# EAGLE board main_board (EAGLE 9.6.2)
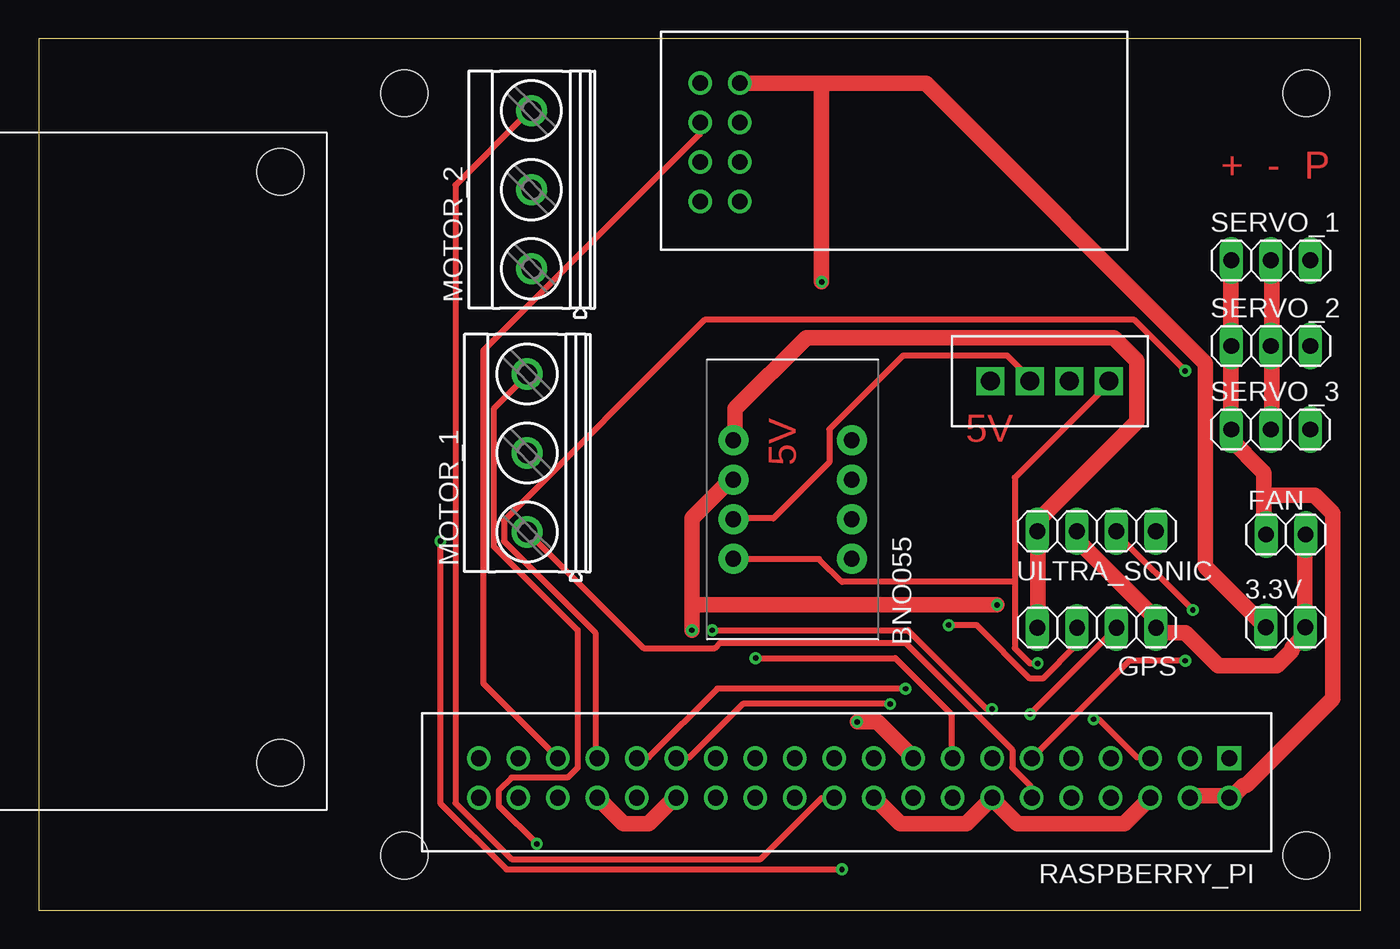
[diagram p0: board, top side]
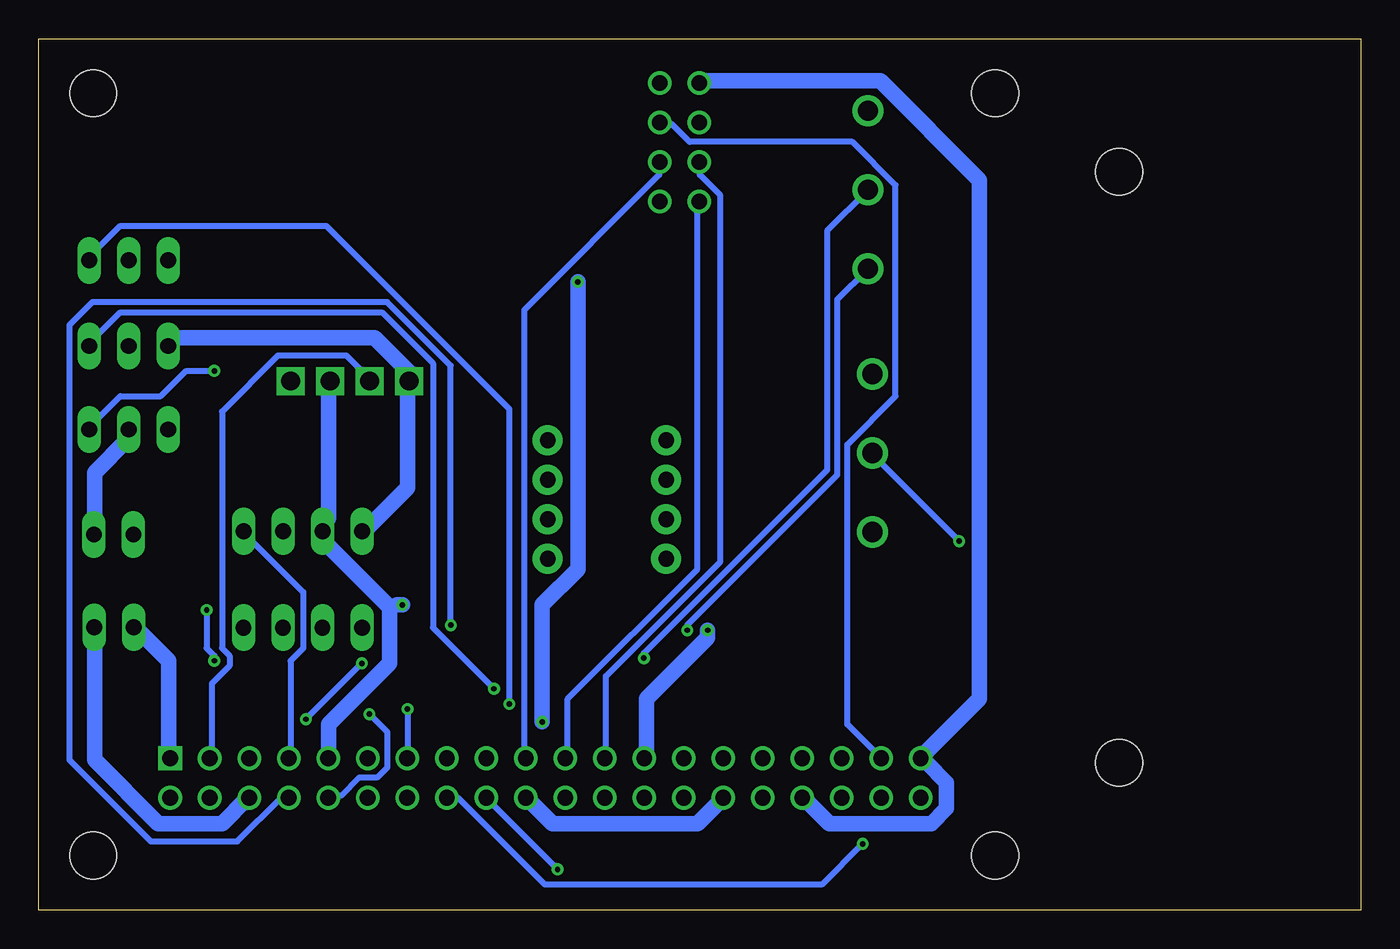
[diagram p1: board, bottom side, seen from below]

Size 85 x 56 mm. Coordinates in mm from the lower left corner, seen from the top.
Outline: 0,56 0,0 85,0 85,56 0,56
Copper layers (1*16): Top 0.035mm / dielectric 1.5mm / Bottom 0.035mm
Design rules "default": minimum track width 6mil, minimum drill 0.35mm, track to track 6mil, track to pad 6mil, pad to pad 6mil, via to via 6mil, smd to smd 6mil, copper to edge 40mil, drill to drill 6mil, minimum pad ring 10mil, minimum via ring 8mil, stop-mask expansion 4mil, vias tented up to drill 0mil, thermal gap 10mil
Net classes: 0 default: width 0.4 mm, clearance 0.254 mm; 1 5V/3,3V/GND: width 1 mm, clearance 0.381 mm
Holes 3 mm at 23.5,3.5 81.5,52.5 23.5,52.5 81.5,3.5 15.53,9.46 15.53,47.46 -22.47,47.46 -22.47,9.46 15.53,9.46 15.53,47.46 15.53,9.46 15.53,47.46 15.53,9.46 15.53,47.46 15.53,9.46 15.53,47.46 15.53,9.46 15.53,47.46 15.53,9.46 15.53,47.46 15.53,9.46 15.53,47.46

## Footprints (pad centres in the part's own frame; a part is rotated, then mirrored left to right if it is on the bottom)
1X02 = drill 1.016 long: 1 -1.27,0; 2 1.27,0
MODULE_2472 = drill 1 pad 1.93: GND -1.27,-3.81; GND_2 1.27,3.81; INT -1.27,3.81; RESET -3.81,3.81; SCL 3.81,-3.81; SDA 1.27,-3.81; VIN -3.81,-3.81; VOUT 3.81,3.81
1X04 = drill 1.016 long: 1 -3.81,0; 2 -1.27,0; 3 1.27,0; 4 3.81,0
L298N_DRIVER = hole 3: 3,3; 41,3; 41,41; 3,41
MKDSN1,5/3-5,08 = drill 1.3 pad 2: 1 -7.641,0.025; 2 -2.561,0.025; 3 2.519,0.025
NRF24L01 = drill 1: CE 2.54,7.62; CSN 5.08,7.62; GND 2.54,10.16; IRQ 5.08,2.54; MISO 2.54,2.54; MOSI 5.08,5.08; SCK 2.54,5.08; VCC 5.08,10.16
MODULE_RASPBERRY_PI_4B_4GB = drill 1.016 square: 1 -34.13,23.23 | drill 1.016: 2 -34.13,25.77; 3 -31.59,23.23; 4 -31.59,25.77; 5 -29.05,23.23; 6 -29.05,25.77; 7 -26.51,23.23; 8 -26.51,25.77; 9 -23.97,23.23; 10 -23.97,25.77; 11 -21.43,23.23; 12 -21.43,25.77; 13 -18.89,23.23; 14 -18.89,25.77; 15 -16.35,23.23; 16 -16.35,25.77; 17 -13.81,23.23; 18 -13.81,25.77; 19 -11.27,23.23; 20 -11.27,25.77; 21 -8.73,23.23; 22 -8.73,25.77; 23 -6.19,23.23; 24 -6.19,25.77; 25 -3.65,23.23; 26 -3.65,25.77; 27 -1.11,23.23; 28 -1.11,25.77; 29 1.43,23.23; 30 1.43,25.77; 31 3.97,23.23; 32 3.97,25.77; 33 6.51,23.23; 34 6.51,25.77; 35 9.05,23.23; 36 9.05,25.77; 37 11.59,23.23; 38 11.59,25.77; 39 14.13,23.23; 40 14.13,25.77
1X03 = drill 1.016 long: 1 -2.54,0; 2 0,0; 3 2.54,0
DHT20 = drill 1.2 square: 5V -3.81,0; GND 1.27,0; SCL 3.81,0; SDA -1.27,0

## Placement (x,y rotation side)
3.3V  [1X02]  80.18,18.18 0 top
BNO055  2472  [MODULE_2472]  48.47,26.39 270 top
FAN  [1X02]  80.19,24.14 0 top
GPS  [1X04]  68.03,18.15 180 top
L298N1  L298N_DRIVER  [L298N_DRIVER]  18.53,6.46 90 top
MOTOR_1  MKDSN1,5/3-5,08  [MKDSN1,5/3-5,08]  31.42,31.94 90 top
MOTOR_2  MKDSN1,5/3-5,08  [MKDSN1,5/3-5,08]  31.7,48.87 90 top
NRF24L1  NRF24L01  [NRF24L01]  40,43 0 top
RASPBERRY_PI  RASPBERRY_PI_4B_4GB  [MODULE_RASPBERRY_PI_4B_4GB]  42.42,32.98 180 top
SERVO_1  [1X03]  79.23,41.76 0 top
SERVO_2  [1X03]  79.23,36.25 0 top
SERVO_3  [1X03]  79.22,30.89 0 top
U$1  DHT20  [DHT20]  65,34 0 top
ULTRA_SONIC  [1X04]  68.03,24.35 0 top

## Library data of the parts
3.3V FAN GPS SERVO_1-SERVO_3 ULTRA_SONIC = pinhead
BNO055 = BNO055_IMU; AVAILABILITY: In Stock; CHECK_PRICES: https://www.snapeda.com/parts/2472/Adafruit+Industries/view-part/?ref=eda; DESCRIPTION: Adafruit 9-DOF Absolute Orientation IMU Fusion Breakout - BNO055 | Adafruit Industries 2472; MF: Adafruit; MP: 2472; PACKAGE: Non-Standard Adafruit; PRICE: None; PURCHASE-URL: https://www.snapeda.com/api/url_track_click_mouser/?unipart_id=6348449&manufacturer=Adafruit&part_name=2472&search_term=bno055; SNAPEDA_LINK: https://www.snapeda.com/parts/2472/Adafruit+Industries/view-part/?ref=snap
L298N1 = L298N_Motor_Driver
MOTOR_1 MOTOR_2 = con-phoenix-508
NRF24L1 = nRF24L01
RASPBERRY_PI = RASPBERRY_PI_4B_4GB; AVAILABILITY: In Stock; CHECK_PRICES: https://www.snapeda.com/parts/RASPBERRY%20PI%204B/4GB/Raspberry+Pi/view-part/?ref=eda; DESCRIPTION: BCM2711 Raspberry Pi 4 Model B 4GB - ARM® Cortex®-A72 MPU Embedded Evaluation Board; MF: Raspberry Pi; MP: RASPBERRY PI 4B/4GB; PACKAGE: None; PRICE: None; SNAPEDA_LINK: https://www.snapeda.com/parts/RASPBERRY%20PI%204B/4GB/Raspberry+Pi/view-part/?ref=snap
U$1 = DHT20

## Nets
3.3V [5V/3,3V/GND]: 3.3V.1 NRF24L1.VCC RASPBERRY_PI.1 RASPBERRY_PI.17
5V [5V/3,3V/GND]: BNO055.VIN FAN.1 GPS.4 RASPBERRY_PI.2 RASPBERRY_PI.4 SERVO_1.1 SERVO_2.1 SERVO_3.1 U$1.5V ULTRA_SONIC.1
BNO055_SCL: BNO055.SCL RASPBERRY_PI.5 U$1.SCL
BNO055_SDA: BNO055.SDA RASPBERRY_PI.3 U$1.SDA
ENA: MOTOR_1.1 RASPBERRY_PI.12
ENB: MOTOR_2.3 RASPBERRY_PI.22
GND [5V/3,3V/GND]: 3.3V.2 BNO055.GND FAN.2 GPS.1 NRF24L1.GND RASPBERRY_PI.6 RASPBERRY_PI.9 RASPBERRY_PI.14 RASPBERRY_PI.20 RASPBERRY_PI.25 RASPBERRY_PI.30 RASPBERRY_PI.34 RASPBERRY_PI.39 SERVO_1.2 SERVO_2.2 SERVO_3.2 U$1.GND ULTRA_SONIC.2
IN1: MOTOR_1.2 RASPBERRY_PI.18
IN2: MOTOR_1.3 RASPBERRY_PI.16
IN3: MOTOR_2.1 RASPBERRY_PI.13
IN4: MOTOR_2.2 RASPBERRY_PI.15
N$1: NRF24L1.CE RASPBERRY_PI.35
N$2: NRF24L1.CSN RASPBERRY_PI.37
N$3: NRF24L1.SCK RASPBERRY_PI.23
N$4: NRF24L1.MOSI RASPBERRY_PI.19
N$5: NRF24L1.MISO RASPBERRY_PI.21
PWM_SERVO_1: RASPBERRY_PI.29 SERVO_1.3
PWM_SERVO_2: RASPBERRY_PI.31 SERVO_2.3
PWM_SERVO_3: RASPBERRY_PI.33 SERVO_3.3
RX: GPS.3 RASPBERRY_PI.8
TX: GPS.2 RASPBERRY_PI.10
ULTRA_SONIC_1: RASPBERRY_PI.7 ULTRA_SONIC.4
ULTRA_SONIC_2: RASPBERRY_PI.11 ULTRA_SONIC.3

## Tracks (layer width: path | path; a pad name or v marks a point on that pad's centre or on a via)
3.3V  (via drill 0.35)
  Top 1: 50.34,53.14 57.04,53.14 75.03,35.15 75.03,22.07 78.79,18.31 3.3V.1 | 50.34,53.14 45.11,53.14 NRF24L1.VCC | v52.63,12.1 53.94,12.1 56.22,9.81 RASPBERRY_PI.17 | 50.34,53.14 v50.34,40.38
  Bottom 1: v52.63,12.1 52.63,19.62 50.34,21.91 v50.34,40.38 | RASPBERRY_PI.1 76.66,9.81 76.66,16.02 78.79,18.15 3.3V.1
5V
  Top 1: GPS.4 64.23,18.31 64.23,24.2 ULTRA_SONIC.1 64.23,24.85 64.23,25.02 70.61,31.39 70.61,35.32 69.14,36.79 49.36,36.79 44.78,32.21 44.78,30.25 BNO055.VIN | RASPBERRY_PI.4 74.05,7.36 76.5,7.36 RASPBERRY_PI.2 76.99,7.52 77.48,8.01 77.64,8.01 83.2,13.57 83.2,25.51 82.06,26.65 78.79,26.65 | 78.79,26.65 78.79,28.12 76.5,30.41 SERVO_3.1 76.66,30.9 76.66,36.13 SERVO_2.1 76.66,36.62 76.66,41.69 SERVO_1.1 | 78.79,26.65 78.79,24.2 FAN.1
  Bottom 1: ULTRA_SONIC.1 64.07,24.36 61.29,27.14 61.29,33.84 U$1.5V 61.13,34.5 63.42,36.79 76.17,36.79 76.66,36.3 SERVO_2.1
BNO055_SCL  (via drill 0.35)
  Top 0.4: v67.83,12.26 68.16,12.26 70.61,9.81 71.43,9.81 RASPBERRY_PI.5 | v64.23,15.86 63.75,15.86 62.76,16.84 62.76,21.09 | 62.76,21.09 62.76,27.8 68.81,33.84 U$1.SCL | 62.76,21.09 51.65,21.09 50.17,22.56 44.78,22.56 BNO055.SCL
  Bottom 0.4: v64.23,15.86 v67.83,12.26
BNO055_SDA
  Top 0.4: BNO055.SDA 44.78,25.18 47.23,25.18 50.83,28.78 50.83,30.9 55.57,35.64 62.27,35.64 63.58,34.34 63.58,34.01 U$1.SDA
  Bottom 0.4: RASPBERRY_PI.3 73.88,9.81 73.88,14.55 72.74,15.7 72.74,16.35 73.23,16.84 73.23,32.05 69.63,35.64 65.22,35.64 63.58,34.01 U$1.SDA
ENA
  Top 0.4: RASPBERRY_PI.12 63.75,7.36 63.75,8.01 62.6,9.16 62.6,10.3 55.73,17.17 43.8,17.17 43.47,16.84 38.89,16.84 31.53,24.2 MOTOR_1.1
ENB
  Top 0.4: RASPBERRY_PI.22 50.99,7.19 50.34,7.19 46.41,3.27 30.39,3.27 26.79,6.87 26.79,46.6 31.53,51.34 MOTOR_2.3
GND  (via drill 0.35)
  Top 1: FAN.2 81.4,24.04 81.4,18.31 3.3V.2 81.4,17.66 80.58,16.84 80.58,16.68 79.6,15.7 75.84,15.7 73.72,17.82 72.25,17.82 GPS.1 71.76,18.31 71.76,18.8 66.85,23.71 66.85,24.2 ULTRA_SONIC.2 | SERVO_3.2 79.28,30.9 79.28,36.13 SERVO_2.2 79.28,36.62 79.28,41.69 SERVO_1.2 | 42,19.62 42,25.18 44.62,27.8 BNO055.GND | 42,19.62 v42,17.98 | v61.62,19.62 42,19.62 | RASPBERRY_PI.34 35.95,7.19 37.59,5.56 39.22,5.56 40.85,7.19 RASPBERRY_PI.30 | RASPBERRY_PI.20 53.77,7.19 55.41,5.56 59.66,5.56 61.29,7.19 RASPBERRY_PI.14 61.62,6.87 62.93,5.56 69.79,5.56 71.43,7.19 RASPBERRY_PI.6
  Bottom 1: FAN.2 81.4,24.2 81.4,28.12 79.28,30.25 79.28,30.74 SERVO_3.2 | v42,17.98 42,17.49 45.92,13.57 45.92,9.81 RASPBERRY_PI.25 | 62.44,19.46 62.44,15.86 66.36,11.94 66.36,9.81 RASPBERRY_PI.9 | 62.44,19.46 66.69,23.71 66.69,24.2 ULTRA_SONIC.2 66.69,24.85 66.36,25.18 66.36,33.84 U$1.GND | v61.62,19.62 61.95,19.62 62.44,19.46 | RASPBERRY_PI.30 41.02,7.19 42.65,5.56 51.97,5.56 53.61,7.19 RASPBERRY_PI.20 | NRF24L1.GND 42.49,53.3 30.88,53.3 24.51,46.92 24.51,13.57 28.27,9.81 RASPBERRY_PI.39 27.94,9.48 26.63,8.18 26.63,6.54 27.61,5.56 34.15,5.56 35.79,7.19 RASPBERRY_PI.34 | 3.3V.2 81.4,18.15 81.4,9.65 77.32,5.56 73.23,5.56 71.59,7.19 RASPBERRY_PI.6
IN1  (via drill 0.35)
  Top 0.4: v51.65,2.62 30.06,2.62 25.81,6.87 v25.81,23.71
  Bottom 0.4: v51.65,2.62 56.22,7.19 RASPBERRY_PI.18 | v25.81,23.71 31.37,29.27 MOTOR_1.2
IN2  (via drill 0.35)
  Top 0.4: v32.03,4.25 29.57,6.7 29.57,7.68 30.39,8.5 33.99,8.5 34.64,9.16 34.64,17.98 29.25,23.38 29.25,32.21 31.37,34.34 MOTOR_1.3
  Bottom 0.4: v32.03,4.25 34.64,1.64 52.46,1.64 58.02,7.19 58.68,7.19 RASPBERRY_PI.16
IN3  (via drill 0.35)
  Top 0.4: v61.29,12.92 60.97,12.92 55.9,17.98 v43.31,17.98
  Bottom 0.4: v61.29,12.92 61.29,9.81 RASPBERRY_PI.13 | v43.31,17.98 43.31,18.31 33.66,27.96 33.66,39.24 31.7,41.2 MOTOR_2.1
IN4  (via drill 0.35)
  Top 0.4: v46.09,16.19 55.08,16.19 58.68,12.59 58.68,9.81 RASPBERRY_PI.15
  Bottom 0.4: v46.09,16.19 46.09,16.51 34.31,28.29 34.31,43.65 31.7,46.27 MOTOR_2.2
N$1
  Top 0.4: NRF24L1.CE 42.49,50.52 42.49,49.87 28.59,35.97 28.59,14.55 33.33,9.81 RASPBERRY_PI.35
N$2
  Bottom 0.4: NRF24L1.CSN 44.94,50.52 44.29,50.52 43.14,49.38 32.68,49.38 29.9,46.6 29.9,33.03 33.01,29.92 33.01,11.94 30.88,9.81 RASPBERRY_PI.37
N$3
  Bottom 0.4: NRF24L1.SCK 42.49,48.07 42.49,47.25 41.18,45.94 41.18,22.4 48.54,15.04 48.54,9.81 RASPBERRY_PI.23
N$4
  Bottom 0.4: NRF24L1.MOSI 45.11,48.07 45.11,47.25 53.77,38.59 53.77,9.81 RASPBERRY_PI.19
N$5
  Bottom 0.4: NRF24L1.MISO 42.65,45.45 42.65,21.91 50.99,13.57 50.99,9.81 RASPBERRY_PI.21
PWM_SERVO_1  (via drill 0.35)
  Top 0.4: v54.75,13.24 45.27,13.24 41.84,9.81 41.02,9.81 RASPBERRY_PI.29
  Bottom 0.4: v54.75,13.24 54.75,32.21 66.52,43.98 79.77,43.98 81.89,41.86 SERVO_1.3
PWM_SERVO_2  (via drill 0.35)
  Top 0.4: v55.73,14.22 43.63,14.22 39.22,9.81 38.57,9.81 RASPBERRY_PI.31
  Bottom 0.4: v55.73,14.22 59.66,18.15 59.66,35.15 62.93,38.42 79.77,38.42 81.89,36.3 SERVO_2.3
PWM_SERVO_3  (via drill 0.35)
  Top 0.4: v73.72,34.66 70.45,37.93 42.82,37.93 29.9,25.02 29.9,23.71 35.79,17.82 35.79,9.81 RASPBERRY_PI.33
  Bottom 0.4: v73.72,34.66 75.52,34.66 77.15,33.03 79.77,33.03 81.89,30.9 SERVO_3.3
RX  (via drill 0.35)
  Top 0.4: v58.51,18.31 60.31,18.31 63.75,14.88 64.56,14.88 66.69,17 66.69,18.15 GPS.3
  Bottom 0.4: v58.51,18.31 58.51,34.99 62.6,39.08 81.57,39.08 83.04,37.6 83.04,9.65 77.81,4.42 72.25,4.42 69.47,7.19 68.98,7.19 RASPBERRY_PI.8
TX  (via drill 0.35)
  Top 0.4: v63.75,12.59 GPS.2
  Bottom 0.4: v63.75,12.59 62.6,11.45 62.6,9.16 63.25,8.5 64.4,8.5 65.54,7.36 66.36,7.36 RASPBERRY_PI.10
ULTRA_SONIC_1
  Bottom 0.4: RASPBERRY_PI.7 68.81,9.81 68.81,16.02 68,16.84 68,20.44 71.76,24.2 ULTRA_SONIC.4
ULTRA_SONIC_2  (via drill 0.35)
  Top 0.4: v73.72,16.02 70.12,16.02 63.91,9.81 RASPBERRY_PI.11 | v74.21,19.29 69.3,24.2 ULTRA_SONIC.3
  Bottom 0.4: v73.72,16.02 73.72,16.35 74.21,16.84 v74.21,19.29

## Text on the board
Top: + | - | P | 5V | 5V